# EAGLE board Copy of Copy of Parcial_1 (EAGLE 7.6.0)

Size 73.58 x 63.39 mm. Coordinates in mm from the lower left corner, seen from the top.
Outline: 0,0 56.82,0 56.82,53.33 0,53.33 0,0
Copper layers (1*16): Top 0.035mm / dielectric 1.5mm / Bottom 0.035mm
Design rules "default": minimum track width 10mil, minimum drill 24mil, track to track 8mil, track to pad 8mil, pad to pad 8mil, via to via 8mil, smd to smd 8mil, copper to edge 40mil, drill to drill 8mil, minimum pad ring 10mil, minimum via ring 8mil, stop-mask expansion 4mil, vias tented up to drill 0mil, thermal gap 10mil

## Footprints (pad centres in the part's own frame; a part is rotated, then mirrored left to right if it is on the bottom)
LED-RGB-THRU = drill 0.762 pad 0.889 long: 1 1.905,0; 2 0.635,0; 3 -0.635,0; 4 -1.905,0
0207/10 = drill 0.813 octagon: 1 -5.08,0; 2 5.08,0
ARDUINO_UNO = drill 1.016 pad 1.88: 0 63.5,50.8; 1 60.96,50.8; 2 58.42,50.8; 3 55.88,50.8; 3.3V 35.56,2.54; 4 53.34,50.8; 5 50.8,50.8; 5V 38.1,2.54; 6 48.26,50.8; 7 45.72,50.8; 8 41.656,50.8; 9 39.116,50.8; 10 36.576,50.8; 11 34.036,50.8; 12 31.496,50.8; 13 28.956,50.8; A0 50.8,2.54; A1 53.34,2.54; A2 55.88,2.54; A3 58.42,2.54; A4 60.96,2.54; A5 63.5,2.54; AREF 23.876,50.8; GND 26.416,50.8; GND. 43.18,2.54; GND.. 40.64,2.54; I/OREF 30.48,2.54; N/C 27.94,2.54; RESET 33.02,2.54; SCL 18.796,50.8; SDA 21.336,50.8; VIN 45.72,2.54 | hole 3.2: 66.04,7.62; 66.04,35.56; 15.24,50.8; 13.97,2.54
DIL16 = drill 0.813 long: 1 -8.89,-3.81; 2 -6.35,-3.81; 3 -3.81,-3.81; 4 -1.27,-3.81; 5 1.27,-3.81; 6 3.81,-3.81; 7 6.35,-3.81; 8 8.89,-3.81; 9 8.89,3.81; 10 6.35,3.81; 11 3.81,3.81; 12 1.27,3.81; 13 -1.27,3.81; 14 -3.81,3.81; 15 -6.35,3.81; 16 -8.89,3.81

## Placement (x,y rotation side)
D2  [LED-RGB-THRU]  5,137.08 0 top  (outside the outline)
D3  [LED-RGB-THRU]  5,149.78 0 top  (outside the outline)
D4  [LED-RGB-THRU]  5,162.48 0 top  (outside the outline)
D5  [LED-RGB-THRU]  5,175.18 0 top  (outside the outline)
D6  [LED-RGB-THRU]  5,187.88 0 top  (outside the outline)
D7  [LED-RGB-THRU]  5,200.58 0 top  (outside the outline)
D9  [LED-RGB-THRU]  5,746.68 0 top  (outside the outline)
D10  [LED-RGB-THRU]  5,759.38 0 top  (outside the outline)
D11  [LED-RGB-THRU]  5,772.08 0 top  (outside the outline)
D12  [LED-RGB-THRU]  5,784.78 0 top  (outside the outline)
D13  [LED-RGB-THRU]  5,797.48 0 top  (outside the outline)
D14  [LED-RGB-THRU]  5,810.18 0 top  (outside the outline)
D15  [LED-RGB-THRU]  5,822.88 0 top  (outside the outline)
D16  [LED-RGB-THRU]  5,835.58 0 top  (outside the outline)
D17  [LED-RGB-THRU]  5,213.28 0 top  (outside the outline)
D18  [LED-RGB-THRU]  5,225.98 0 top  (outside the outline)
D19  [LED-RGB-THRU]  5,238.68 0 top  (outside the outline)
D20  [LED-RGB-THRU]  5,251.38 0 top  (outside the outline)
D21  [LED-RGB-THRU]  5,264.08 0 top  (outside the outline)
D22  [LED-RGB-THRU]  5,276.78 0 top  (outside the outline)
D23  [LED-RGB-THRU]  5,289.48 0 top  (outside the outline)
D24  [LED-RGB-THRU]  5,302.18 0 top  (outside the outline)
D25  [LED-RGB-THRU]  5,314.88 0 top  (outside the outline)
D26  [LED-RGB-THRU]  5,327.58 0 top  (outside the outline)
D27  [LED-RGB-THRU]  5,340.28 0 top  (outside the outline)
D28  [LED-RGB-THRU]  5,352.98 0 top  (outside the outline)
D29  [LED-RGB-THRU]  5,365.68 0 top  (outside the outline)
D30  [LED-RGB-THRU]  5,378.38 0 top  (outside the outline)
D31  [LED-RGB-THRU]  5,391.08 0 top  (outside the outline)
D32  [LED-RGB-THRU]  5,403.78 0 top  (outside the outline)
D33  [LED-RGB-THRU]  5,416.48 0 top  (outside the outline)
D34  [LED-RGB-THRU]  5,429.18 0 top  (outside the outline)
D35  [LED-RGB-THRU]  5,441.88 0 top  (outside the outline)
D36  [LED-RGB-THRU]  5,454.58 0 top  (outside the outline)
D37  [LED-RGB-THRU]  5,467.28 0 top  (outside the outline)
D38  [LED-RGB-THRU]  5,479.98 0 top  (outside the outline)
D39  [LED-RGB-THRU]  5,492.68 0 top  (outside the outline)
D40  [LED-RGB-THRU]  5,505.38 0 top  (outside the outline)
D41  [LED-RGB-THRU]  5,518.08 0 top  (outside the outline)
D42  [LED-RGB-THRU]  5,530.78 0 top  (outside the outline)
D43  [LED-RGB-THRU]  5,543.48 0 top  (outside the outline)
D44  [LED-RGB-THRU]  5,556.18 0 top  (outside the outline)
D45  [LED-RGB-THRU]  5,568.88 0 top  (outside the outline)
D46  [LED-RGB-THRU]  5,581.58 0 top  (outside the outline)
D47  [LED-RGB-THRU]  5,594.28 0 top  (outside the outline)
D48  [LED-RGB-THRU]  5,606.98 0 top  (outside the outline)
D49  [LED-RGB-THRU]  5,619.68 0 top  (outside the outline)
D50  [LED-RGB-THRU]  5,632.38 0 top  (outside the outline)
D51  [LED-RGB-THRU]  5,645.08 0 top  (outside the outline)
D52  [LED-RGB-THRU]  5,657.78 0 top  (outside the outline)
D53  [LED-RGB-THRU]  5,670.48 0 top  (outside the outline)
D54  [LED-RGB-THRU]  5,683.18 0 top  (outside the outline)
D55  [LED-RGB-THRU]  5,695.88 0 top  (outside the outline)
D56  [LED-RGB-THRU]  5,708.58 0 top  (outside the outline)
D57  [LED-RGB-THRU]  5,721.28 0 top  (outside the outline)
D58  [LED-RGB-THRU]  5,733.98 0 top  (outside the outline)
D59  [LED-RGB-THRU]  5,848.28 0 top  (outside the outline)
D60  [LED-RGB-THRU]  5,860.98 0 top  (outside the outline)
D61  [LED-RGB-THRU]  5,873.68 0 top  (outside the outline)
D62  [LED-RGB-THRU]  5,886.38 0 top  (outside the outline)
D63  [LED-RGB-THRU]  5,899.08 0 top  (outside the outline)
D64  [LED-RGB-THRU]  5,911.78 0 top  (outside the outline)
D65  [LED-RGB-THRU]  5,924.48 0 top  (outside the outline)
D66  [LED-RGB-THRU]  5,937.18 0 top  (outside the outline)
R1  220‎Ω  [0207/10]  5,48.18 0 top
R10  220‎Ω  [0207/10]  5,60.88 0 top
R11  220‎Ω  [0207/10]  5,73.58 0 top  (outside the outline)
R12  220‎Ω  [0207/10]  5,86.28 0 top  (outside the outline)
R13  220‎Ω  [0207/10]  5,98.98 0 top  (outside the outline)
R14  220‎Ω  [0207/10]  5,949.88 0 top  (outside the outline)
R15  220‎Ω  [0207/10]  5,111.68 0 top  (outside the outline)
R16  220‎Ω  [0207/10]  5,124.38 0 top  (outside the outline)
U1  [ARDUINO_UNO]  5,10.08 0 top
U3  [DIL16]  5,22.78 0 top
U4  [DIL16]  5,35.48 0 top

## Library data of the parts
D2-D7 D9-D66 R1 R10-R16 U1 U3 U4 = AUTODESK_CIRCUITS_BREADBOARD

## Nets
N$1: R13.2 U4.15
N$2: U4.9
N$3: D15.2 D17.2 D25.2 D33.2 D41.2 D49.2 D57.2 D65.2 U3.1
N$4: D5.2 D12.2 D22.2 D30.2 D38.2 D46.2 D54.2 D62.2 U3.4
N$5: D3.2 D10.2 D20.2 D28.2 D36.2 D44.2 D52.2 D60.2 U3.6
N$6: D2.2 D9.2 D19.2 D27.2 D35.2 D43.2 D51.2 D59.2 U3.7
N$7: D7.2 D14.2 D24.2 D32.2 D40.2 D48.2 D56.2 D64.2 U3.2
N$8: U1.2 U3.12 U4.12
N$9: D4.2 D11.2 D21.2 D29.2 D37.2 D45.2 D53.2 D61.2 U3.5
N$10: D6.2 D13.2 D23.2 D31.2 D39.2 D47.2 D55.2 D63.2 U3.3
N$11: U3.9 U4.14
N$12: U1.4 U3.11 U4.11
N$13: D16.2 D18.2 D26.2 D34.2 D42.2 D50.2 D58.2 D66.2 U3.15
N$14: U1.3 U3.14
N$15: R1.2 U4.7
N$16: R10.2 U4.6
N$17: R11.2 U4.5
N$18: R12.2 U4.4
N$19: R14.1 U4.3
N$20: D51.3 D52.3 D53.3 D54.3 D55.3 D56.3 D57.3 D58.3 R13.1
N$21: D27.3 D28.3 D29.3 D30.3 D31.3 D32.3 D33.3 D34.3 R14.2
N$22: D2.3 D3.3 D4.3 D5.3 D6.3 D7.3 D17.3 D18.3 R11.1
N$23: D19.3 D20.3 D21.3 D22.3 D23.3 D24.3 D25.3 D26.3 R12.1
N$24: D59.3 D60.3 D61.3 D62.3 D63.3 D64.3 D65.3 D66.3 R10.1
N$25: U1.GND. U3.8 U3.13 U4.8 U4.13
N$26: U1.5V U3.10 U3.16 U4.10 U4.16
N$27: D9.3 D10.3 D11.3 D12.3 D13.3 D14.3 D15.3 D16.3 R1.1
N$28: R16.1 U4.1
N$29: R15.1 U4.2
N$30: D35.3 D36.3 D37.3 D38.3 D39.3 D40.3 D41.3 D42.3 R15.2
N$31: D43.3 D44.3 D45.3 D46.3 D47.3 D48.3 D49.3 D50.3 R16.2

## Tracks (layer width: path | path; a pad name or v marks a point on that pad's centre or on a via)
N$1  (1 unrouted)
N$3  (8 unrouted)
N$4  (8 unrouted)
N$5  (8 unrouted)
N$6  (8 unrouted)
N$7  (8 unrouted)
N$8  (2 unrouted)
N$9  (8 unrouted)
N$10  (8 unrouted)
N$11  (1 unrouted)
N$12  (2 unrouted)
N$13  (8 unrouted)
N$14  (1 unrouted)
N$15  (1 unrouted)
N$16  (1 unrouted)
N$17  (1 unrouted)
N$18  (1 unrouted)
N$19  (1 unrouted)
N$20  (8 unrouted)
N$21  (8 unrouted)
N$22  (8 unrouted)
N$23  (8 unrouted)
N$24  (8 unrouted)
N$25  (4 unrouted)
N$26  (4 unrouted)
N$27  (8 unrouted)
N$28  (1 unrouted)
N$29  (1 unrouted)
N$30  (8 unrouted)
N$31  (8 unrouted)